# Altium PCB PCB smart socet protopype.PcbDoc
Units mm, origin at the board's own origin, x right, y up, seen from the top; angles counter-clockwise.
Board outline 60.25 x 55.25 mm, 2 copper layers (Top Layer, Bottom Layer), stack 1.569 mm thick; 26 components, 16 nets, 82 pads, 0 vias.
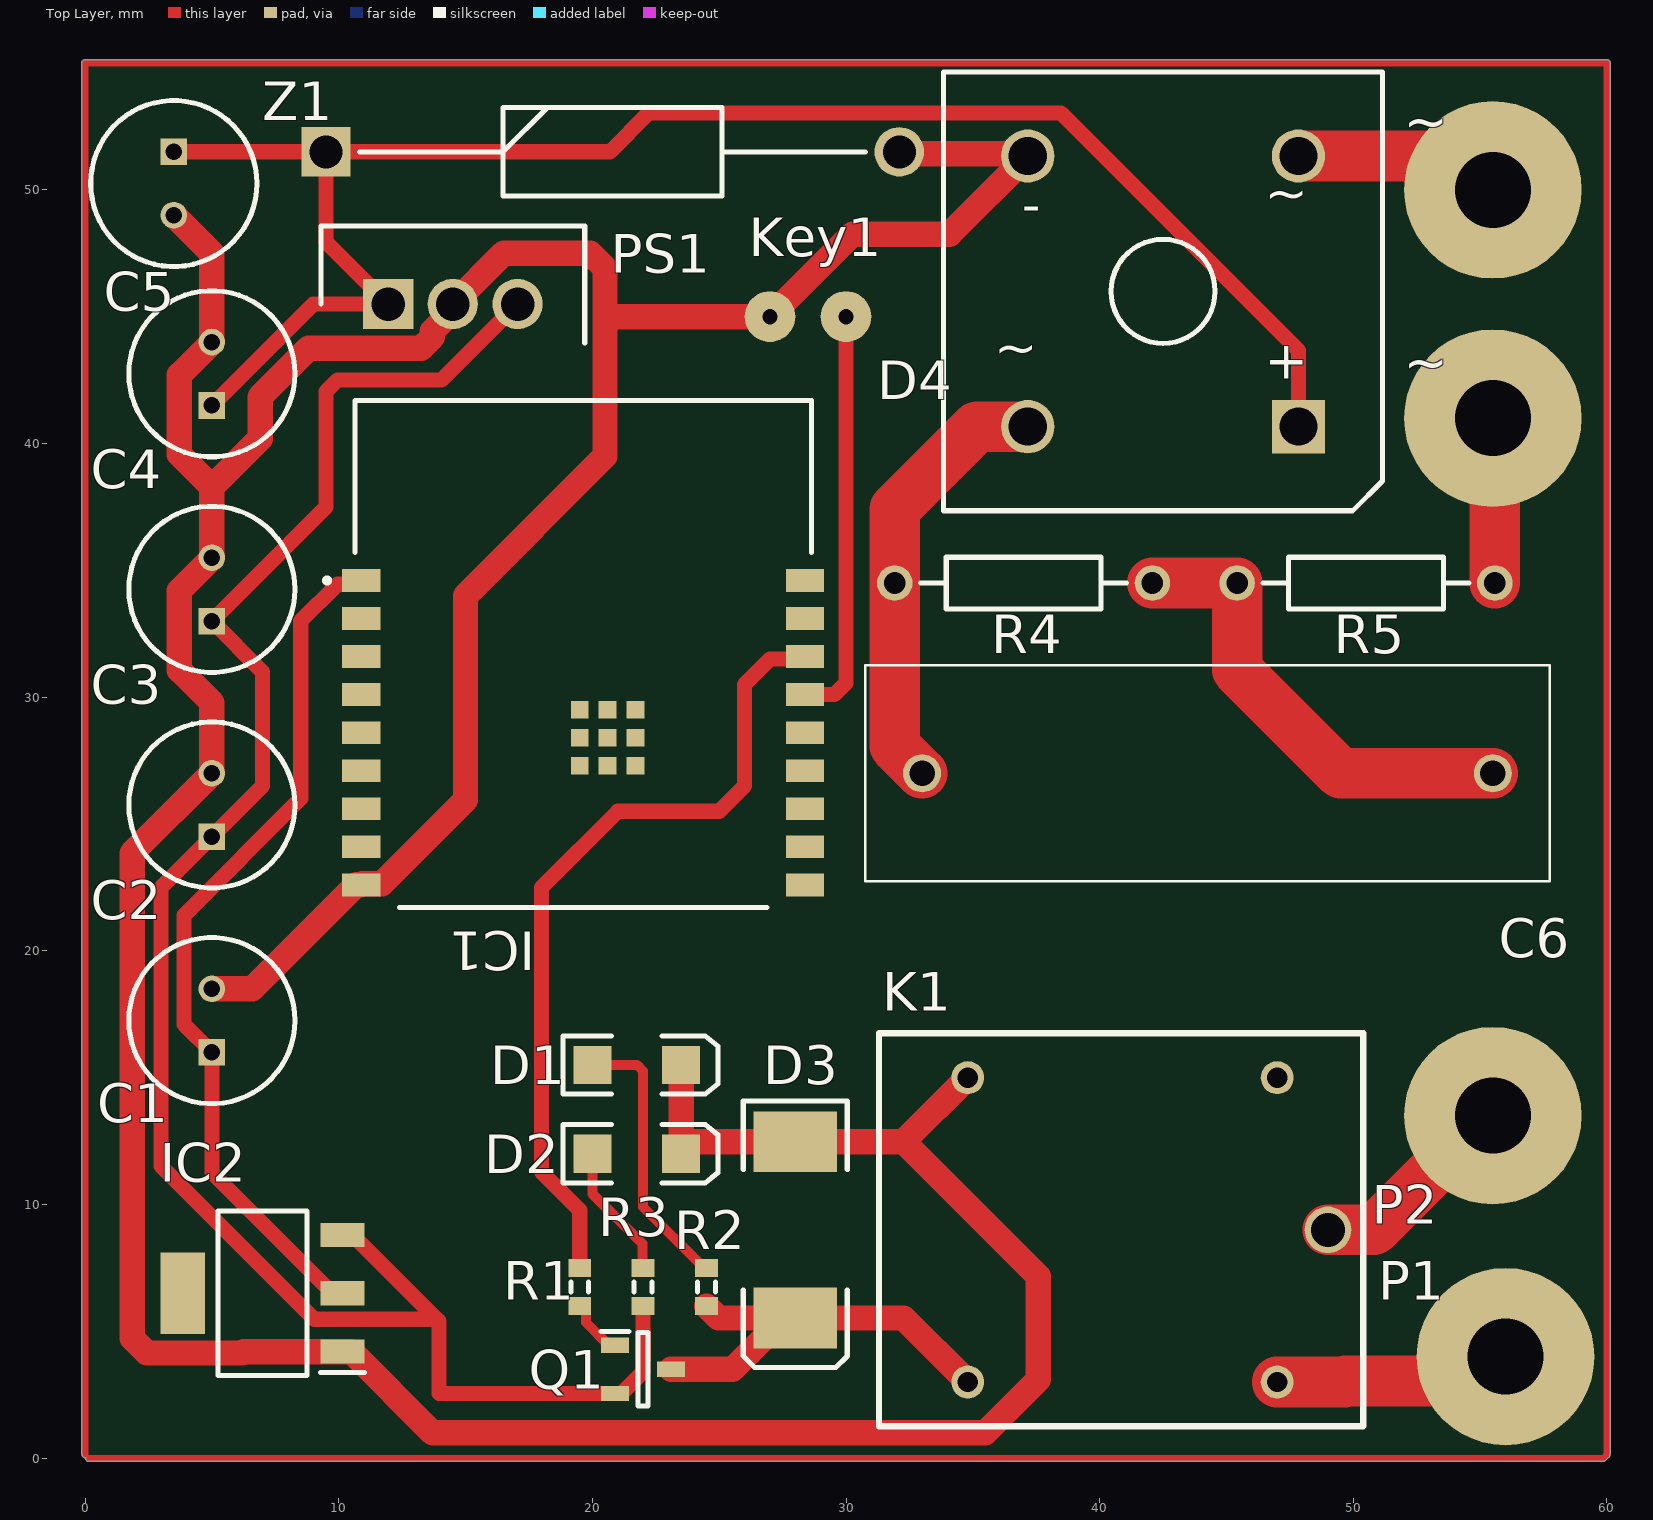
[diagram p0: Top Layer view]
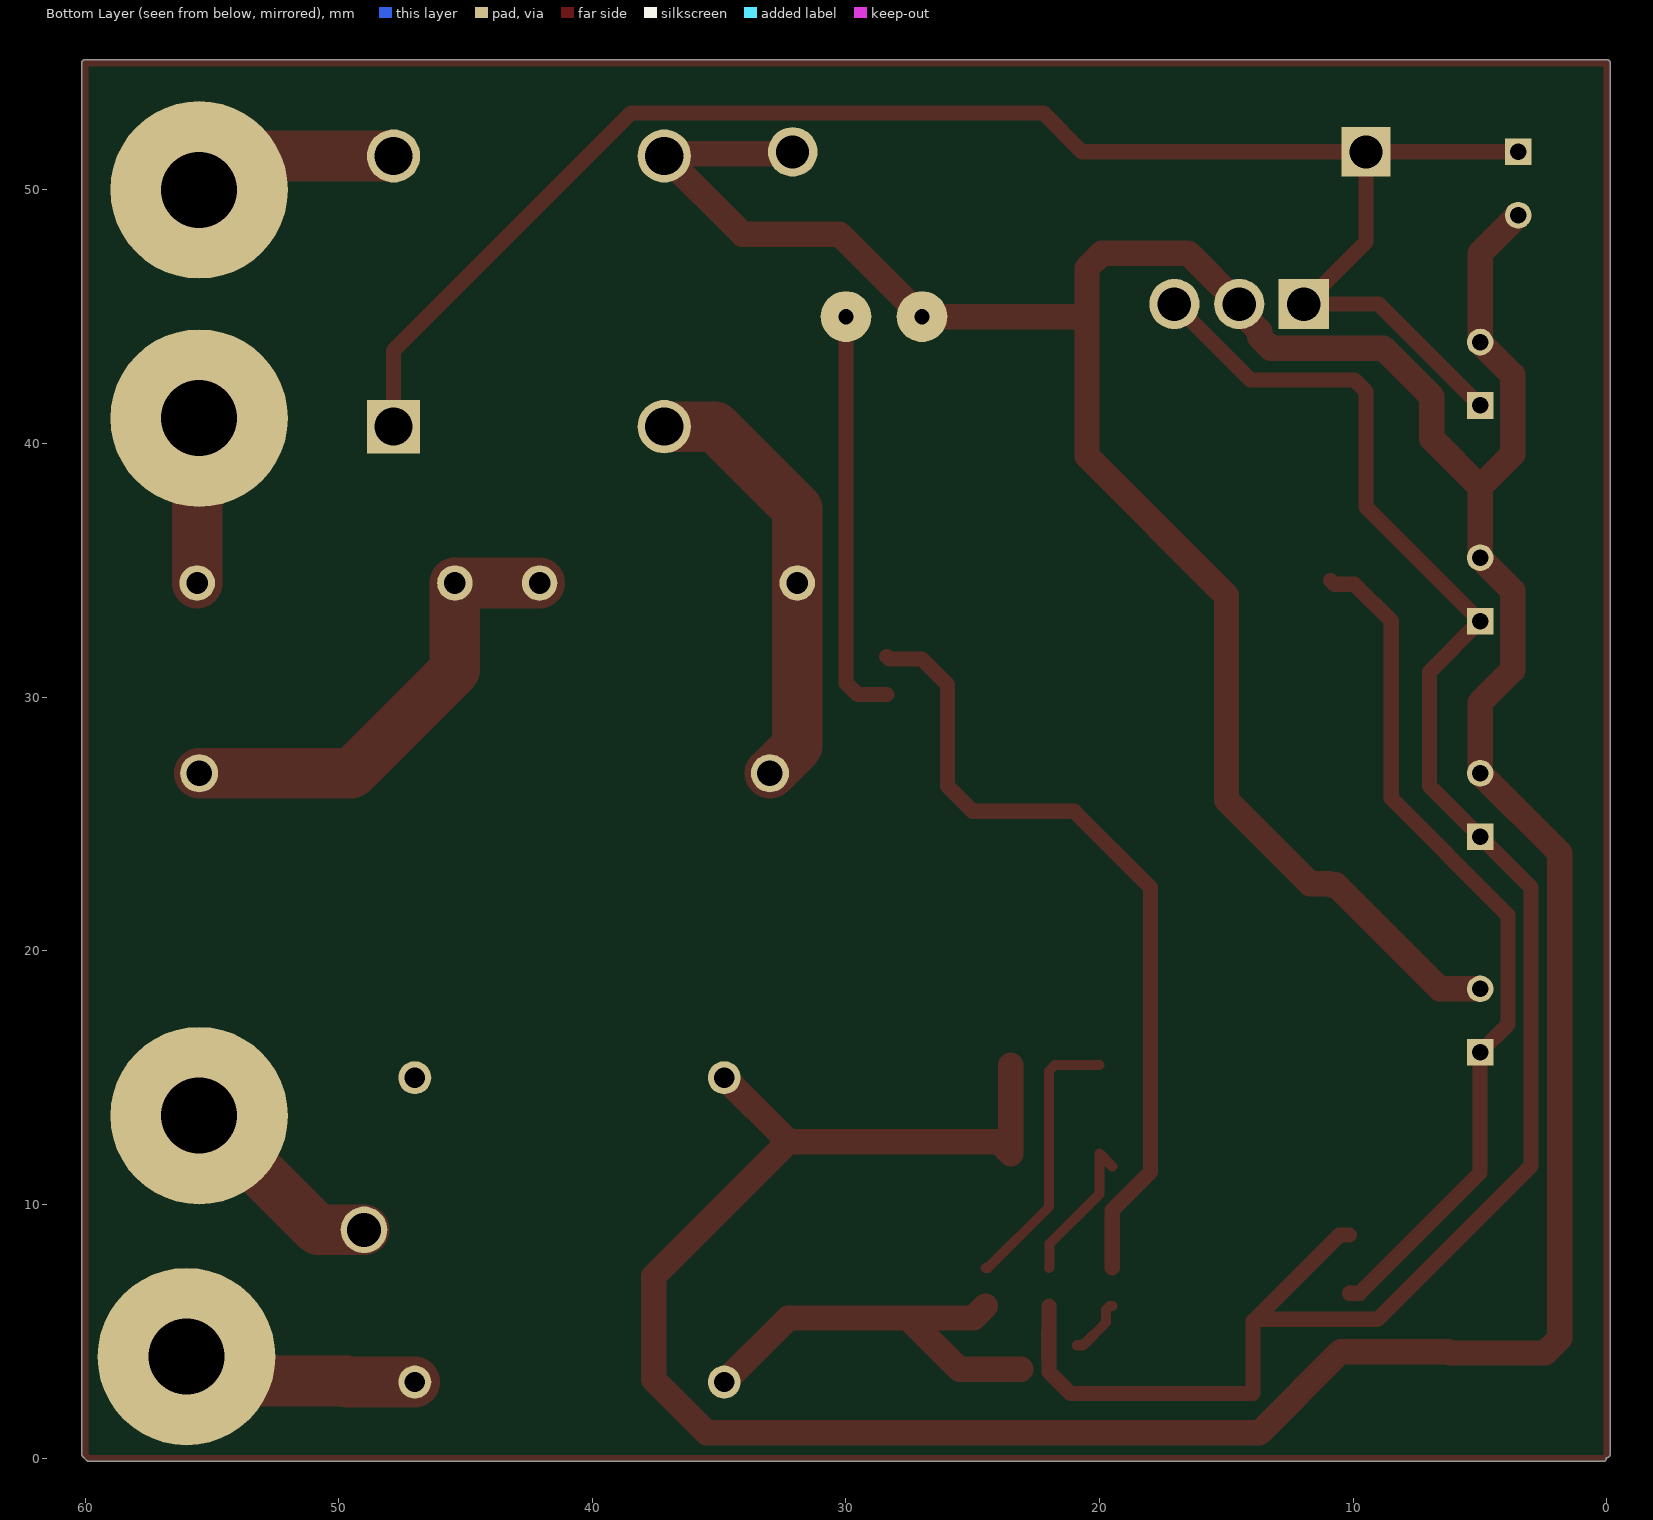
[diagram p1: Bottom Layer view, seen from below]
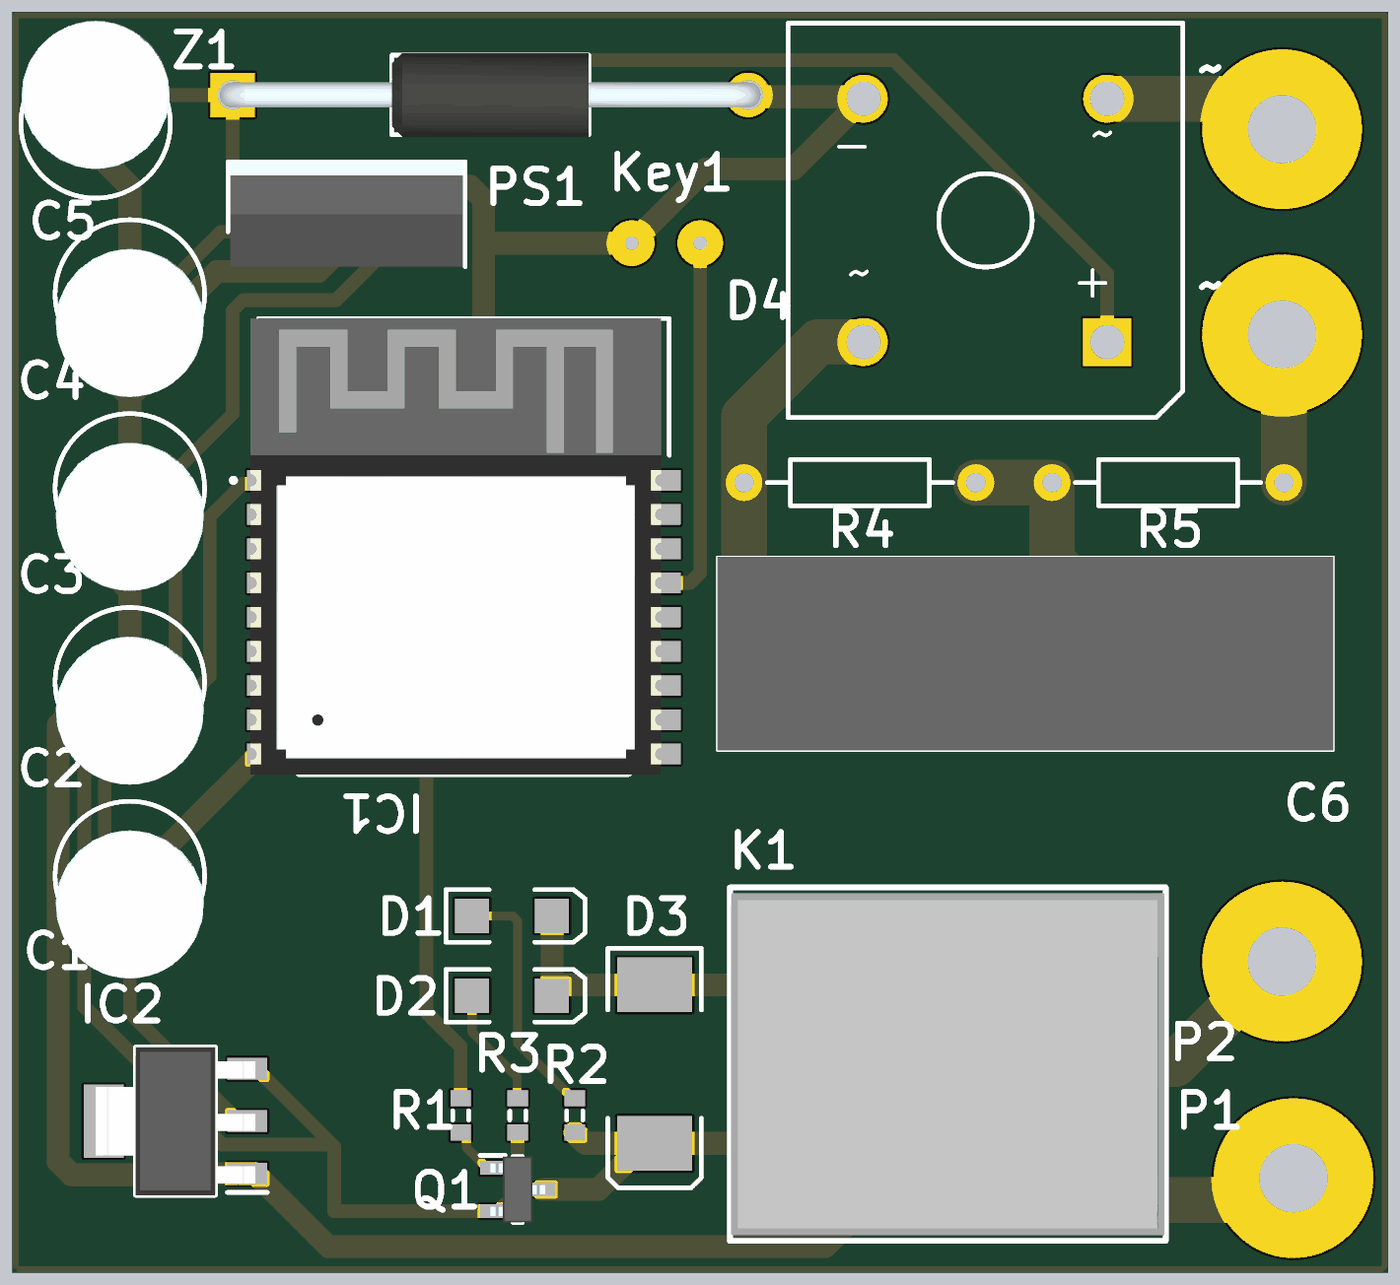
[diagram p2: 3D render of the assembled board from above, using the file's embedded part models]

## Layer stack, top to bottom
Top Solder: solder mask 0.0254, SM-001, Dk 4
Top Layer: signal copper 0.035
Dielectric 1: core 1.4986, Core-043, Dk 4.3
Bottom Layer: signal copper 0.035
Bottom Solder: solder mask 0.0254, SM-001, Dk 4

## Board outline
-0.127,0.149 ccw(c0,0.149) 0.024,0.024 ccw(c0.149,0) 0.149,-0.127 59.851,-0.127 ccw(c59.851,0) 59.942,-0.09 59.941,-0.09 60.09,0.059 60.09,0.058 ccw(c60,0.149) 60.127,0.149 60.127,55 ccw(c60,55) 60,55.127 0,55.127 ccw(c0,55) -0.127,55

## Design rules (kind name [scope] priority, off if disabled: settings)
Clearance [All] p1: gap=0.254 ignorepadtopadclearanceinfootprint=FALSE except(0: Arc-Hole Track-Hole SMDPad-Hole THPad-Hole Via-Hole Fill-Hole Poly-Hole Region-Hole Text-Hole; 0.3: Arc-Arc Arc-Track Track-Track)
PolygonConnect [All] p1: connectstyle=Relief reliefconductorwidth=0.254 reliefentries=4 polygonreliefangle="90 Angle" airgapwidth=0.254
RoutingVias [All] p1: holewidth=0 width=1 viastyle="Through Hole" minholewidth=0 minwidth=0 maxholewidth=1 maxwidth=2
SolderMaskExpansion [All] p1: expansion=0.102 istentingtop=FALSE
Width [All] p1: maxlimit=2 minlimit=0.4 preferedwidth=0.6 minimp=50.000000 maximp=50.000000 favimp=50.000000
30 further rules are at their usual default settings.

## Classes and differential pairs
component class Sheet1: C1 C2 C3 C4 C5 C6 D1 D2 D3 D4 IC1 IC2 K1 Key1 P1 P2 PS1 Q1 R1 R2 R3 R4 R5 Z1

## Components (designator, comment, footprint, x,y, rotation, side; value= is the part's Value field where it differs from the comment)
C1 "22мкФ" CAPPRD250W45D655H650 5,16 r90 top
C2 "10мкФ" CAPPRD250W45D655H650 5,24.5 r90 top
C3 "100мкФ, 16В" CAPPRD250W45D655H650 5,33 r90 top
C4 "2200мкФ, 16В" CAPPRD250W45D655H650 5,41.5 r90 top
C5 "330мкФ, 16В" CAPPRD250W45D655H650 3.5,51.5 r270 top
C6 "5мкФ, 16В" MKP1G033305F00JSSD 33,27 r0 top
D1 "LED2" 3.2X1.6X1.1 21.75,15.5 r0 top
D2 "LED2" 3.2X1.6X1.1 21.75,12 r0 top
D3 "Diode" SMC 28,9 r270 top
D4 "2W10G-E4/51" D-46_6A 42.5,46 r180 top
IC1 "ESP32-C3-WROOM-02-N4" ESP32C3WROOM02N4 20.6,28.4 r0 top
IC2 "LM1117IMP-3.3_NOPB" SOT230P700X180-4N 7,6.5 r180 top
K1 "SRD-05VDC-SL-C" SRD 49,9 r180 top
Key1 "Button" "Button remote" 28.5,45 r180 top
P1 "Power_pin" "Power_hole 7-3"#1 56,4 r0 top
P2 "Power_pin" "Power_hole 7-3"#1 55.5,13.5 r0 top
PS1 "L78M05ABV-DG" TO255P460X1020X2008-3P 11.95,45.5 r0 top
Q1 "S8550" SOT95P240X115-3N 22,3.5 r0 top
R1 "Res3" J1-0603 19.5,6.75 r270 top value=1K
R2 "Res3" J1-0603 24.5,6.75 r270 top value=1K
R3 "Res3" J1-0603 22,6.75 r270 top value=1K
R4 "Res2" AXIAL-0.4 37,34.5 r0 top value=0.5М
R5 "Res2" AXIAL-0.4 50.5,34.5 r0 top value=10
Z1 "1N5349BRLG" DIOAD2260W109L864D349 9.5,51.5 r0 top
~ "Comment" "Power_hole 7-3"#2 55.5,50 r0 top
~ "Comment" "Power_hole 7-3"#2 55.5,41 r0 top

## Footprints (in the part's own frame and the unit in brackets; to place one, negate y for a bottom-side part, rotate by r counter-clockwise, add the part's x,y. Pads: shape width x height; smd on the part's side, far side on the other; paste and mask are expansions set on the pad)
3.2X1.6X1.1 [mm] "SMT LED; 2 Flat Leads"
  rect 1.5x1.5 smd: 1(-1.75,0) 2(1.75,0)
  silkscreen extent -2.9,-1.15 3.2,1.15
AXIAL-0.4 [mm] "Axial Device, Thru-Hole; 2 Leads; 0.4 in Pin Spacing"
  round 1.4 hole 0.85: 1(-5.08,0) 2(5.08,0)
  silkscreen extent -4.06,-1.02 4.06,1.02
"Button remote" [mm]
  round 2 hole 0.6: 1(-1.5,0) 2(1.5,0)
CAPPRD250W45D655H650 [mm]
  rect 1.05x1.05 hole 0.65: 1(0,0)
  round 1.05 hole 0.65: 2(2.5,0)
  silkscreen extent -2.02,-3.27 4.52,3.27, body extent -3.25,-3.25 3.25,3.25, height 5.7
D-46_6A [mm] "Bridge Rectifier; 4 Terminals; Body 16.8 x 16.8 mm (typ); Pitch 10.67 mm"
  rect 2.1x2.1 hole 1.5: 1(-5.335,5.335)
  round 2.1 hole 1.5: 2(-5.335,-5.335) 3(5.335,-5.335) 4(5.335,5.335)
  silkscreen extent -8.65,-8.65 8.65,8.65, body extent -8.65,-8.65 8.65,8.65, height 6.35
DIOAD2260W109L864D349 [mm]
  rect 1.95x1.95 hole 1.3: 1(0,0)
  round 1.95 hole 1.3: 2(22.6,0)
  silkscreen extent 1.33,-1.75 21.27,1.75, body extent -0.54,-1.84 23.14,1.84, height 3.68
ESP32C3WROOM02N4 [mm]
  rect 1.5x0.9 smd: 1(-9.71,6.2) 2(-9.71,4.7) 3(-9.71,3.2) 4(-9.71,1.7) 5(-9.71,0.2) 6(-9.71,-1.3) 7(-9.71,-2.8) 8(-9.71,-4.3) 9(-9.71,-5.8) 10(7.79,-5.8) 11(7.79,-4.3) 12(7.79,-2.8) 13(7.79,-1.3) 14(7.79,0.2) 15(7.79,1.7) 16(7.79,3.2) 17(7.79,4.7) 18(7.79,6.2)
  rect 0.7x0.7 smd: 19(0,0) 20(1.1,0) 21(1.1,1.1) 22(0,1.1) 23(-1.1,1.1) 24(-1.1,0) 25(-1.1,-1.1) 26(0,-1.1) 27(1.1,-1.1)
  silkscreen extent -11.16,-6.7 8.04,13.3, body extent -10.31,-6.7 7.69,13.3, height 3.2
J1-0603 [mm] "Chip Resistor, Body 1.6x0.8mm, IPC High Density"
  rect 0.7x0.9 smd: 1(-0.75,0) 2(0.75,0)
  silkscreen extent -0.2,-0.35 0.2,0.35, body extent -0.85,-0.48 0.85,0.48, height 0.9
MKP1G033305F00JSSD [mm]
  round 1.5 hole 1: 1(0,0) 2(22.5,0)
  silkscreen extent -2.25,-4.25 24.75,4.25, body extent -2.25,-4.25 24.75,4.25, height 18.6
"Power_hole 7-3"#1 [mm]
  round 7 hole 3: 1(0,0)
"Power_hole 7-3"#2 [mm]
  round 7 hole 3: ~(0,0)
SMC [mm] "DO-214-AB/SMC; 2 C-Bend Leads; Body 7.9 x 5.9 mm, inc. leads (LxW)"
  rect 2.4x3.3 smd: 1(-3.475,0) 2(3.475,0)
  silkscreen extent -5.07,-2.05 5.43,2.05
SOT95P240X115-3N [mm]
  rect 1.1x0.6 smd: 1(-1.1,0.95) 2(-1.1,-0.95) 3(1.1,0)
  silkscreen extent -1.65,-1.45 0.2,1.5, body extent -1.2,-1.45 1.2,1.45, height 1.15
SOT230P700X180-4N [mm]
  rect 1.75x0.95 smd: 1(-3.15,2.3) 2(-3.15,0) 3(-3.15,-2.3)
  rect 1.75x3.2 smd: 4(3.15,0)
  silkscreen extent -4.03,-3.25 1.75,3.25, body extent -3.5,-3.25 3.5,3.25, height 1.68
SRD [mm]
  round 1.84 hole 1.34: 1(0,0)
  round 1.3 hole 0.8: 2(2,6) 3(2,-6) 4(14.2,6) 5(14.2,-6)
  silkscreen extent -1.4,-7.75 17.7,7.75, body extent -1.35,-7.5 17.65,7.5, height 15.04
TO255P460X1020X2008-3P [mm]
  rect 1.98x1.98 hole 1.32: 1(0,0)
  round 1.98 hole 1.32: 2(2.55,0) 3(5.1,0)
  silkscreen extent -2.65,-1.53 7.75,3.07, body extent -2.55,-1.53 7.65,3.07, height 19.21

## Part data
C1 C2 C3 C4 C5: library part 16MH5100MEFC6.3X5, "Capacitor Polarised", Manufacturer_Name=Rubycon, Mouser Part Number=232-16MH5100MEFC63X5, Datasheet Link=http://www.rubycon.co.jp/en/catalog/e_pdfs/aluminum/e_mh5.pdf, Height=6.5mm, Manufacturer_Part_Number=16MH5100MEFC6.3X5, Mouser Price/Stock=https://www.mouser.co.uk/ProductDetail/Rubycon/16MH5100MEFC63X5?qs=T3oQrply3y%252Bof2aeEfE49A%3D%3D
C6: library part MKP1G033305F00JSSD, "Capacitor", Manufacturer_Name=WIMA, Mouser Part Number=505-MKP1G033305F00JS, Datasheet Link=https://componentsearchengine.com/Datasheets/1/MKP1G033305F00JSSD.pdf, Height=18.5mm, Manufacturer_Part_Number=MKP1G033305F00JSSD, Mouser Price/Stock=https://www.mouser.co.uk/ProductDetail/WIMA/MKP1G033305F00JSSD?qs=OanN%252B0kfw%2FYGuQnfZtfF2A%3D%3D
D1 D2: "Typical RED, GREEN, YELLOW, AMBER GaAs LED", LatestRevisionDate=17-Jul-2002, LatestRevisionNote="Re-released for DXP Platform.", PackageDescription="SM LED; 2 Flat Leads", PackageReference=3.2X1.6X1.1, PackageVersion=Feb-2002, Published=8-Jun-2000, Publisher="Altium Limited"
D3: "Default Diode", Code_JEDEC=DO-214-AB, LatestRevisionDate=17-Jul-2002, LatestRevisionNote="Re-released for DXP Platform.", PackageDescription="DO-214-AB/SMC; 2 C-Bend Leads; Body 7.9 x 5.9 mm, inc. leads (LxW)", PackageReference=SMC, PackageVersion=Sep-1996, Published=8-Jun-2000, Publisher="Altium Limited"
D4: library part Bridge2, "Diode Bridge", LatestRevisionDate=17-Jul-2002, LatestRevisionNote="Re-released for DXP Platform.", PackageDescription="Bridge Rectifier; 4 Terminals; Body 16.8 x 16.8 mm (typ); Pitch 10.67 mm", PackageReference=D-46_6A, Published=24-Mar-1999, Publisher="Altium Limited"
IC1: "Integrated Circuit", Manufacturer_Name="Espressif Systems", Mouser Part Number=356-ESP32C3WROOM02N4, Datasheet Link=https://www.mouser.ch/datasheet/2/891/Espressif_ESP32_C3_WROOM_02-2006871.pdf, Height=3.35mm, Manufacturer_Part_Number=ESP32-C3-WROOM-02-N4, Mouser Price/Stock=https://www.mouser.co.uk/ProductDetail/Espressif-Systems/ESP32-C3-WROOM-02-N4?qs=stqOd1AaK7%2FqjTZKEOgfUg%3D%3D
IC2: "Integrated Circuit", Arrow Part Number=LM1117IMP-3.3/NOPB, Manufacturer_Name="Texas Instruments", Mouser Part Number=926-LM1117IMP3.3NOPB, Arrow Price/Stock=https://www.arrow.com/en/products/lm1117imp-3.3nopb/texas-instruments?region=nac, Datasheet Link=https://www.ti.com/lit/ds/symlink/lm1117.pdf?ts=1607578196475&ref_url=https%253A%252F%252Fwww.google.com%252F, Height=1.8mm, Manufacturer_Part_Number=LM1117IMP-3.3/NOPB, Mouser Price/Stock=https://www.mouser.co.uk/ProductDetail/Texas-Instruments/LM1117IMP-33-NOPB?qs=X1J7HmVL2ZFbpN1TgOsjYQ%3D%3D
K1: "Relay or Contactor", Manufacturer_Name="Songle Relay", Datasheet Link=http://files.microjpm.webnode.com/200001010-dda41de9e1/Songle%20Relay%20Datasheet.pdf, Manufacturer_Part_Number=SRD-05VDC-SL-C
PS1: "Power Supply", Manufacturer_Name=STMicroelectronics, Mouser Part Number=511-L78M05ABV-DG, Arrow Part Number=L78M05ABV-DG, Arrow Price/Stock=https://www.arrow.com/en/products/l78m05abv-dg/stmicroelectronics?region=europe, Datasheet Link=https://componentsearchengine.com/Datasheets/1/L78M05ABV-DG.pdf, Height=4.6mm, Manufacturer_Part_Number=L78M05ABV-DG, Mouser Price/Stock=https://www.mouser.co.uk/ProductDetail/STMicroelectronics/L78M05ABV-DG?qs=WHlX%252B%252B9%2FRwDCteR6J2ExhA%3D%3D
Q1: "Transistor BJT PNP", Manufacturer_Name="Changjiang Electronics Tech (CJ)", Datasheet Link=https://datasheet.lcsc.com/szlcsc/Changjiang-Electronics-Tech-CJ-S8550_C105432.pdf, Height=1.15mm, Manufacturer_Part_Number=S8550
R1 R2 R3 R4 R5: "Resistor", Published=8-Jun-2000, Publisher="Altium Limited"
  R1 R2 R3: LatestRevisionDate=29-May-2009, LatestRevisionNote="IPC-7351 Footprint Added.", PackageDescription="Chip Resistor", PackageReference=J1-0603
  R4 R5: LatestRevisionDate=17-Jul-2002, LatestRevisionNote="Re-released for DXP Platform.", PackageDescription="Axial Device, Thru-Hole; 2 Leads; 0.4 in Pin Spacing", PackageReference=AXIAL-0.4
Z1: "Zener Diode", Manufacturer_Name="ON Semiconductor", Mouser Part Number=863-1N5349BRLG, Arrow Part Number=1N5349BRLG, Arrow Price/Stock=https://www.arrow.com/en/products/1n5349brlg/on-semiconductor?region=nac, Datasheet Link=https://datasheet.datasheetarchive.com/originals/distributors/SFDatasheet-3/sf-00075052.pdf, Manufacturer_Part_Number=1N5349BRLG, Mouser Price/Stock=https://www.mouser.co.uk/ProductDetail/onsemi/1N5349BRLG?qs=y2kkmE52mdPPPvJa3zV6XA%3D%3D

## Nets (pads, with @x,y where several pads share a name; then routed paths per layer and width w, separated by ;. In a path a pad name is that pad's centre, name@x,y a point inside that pad or via, vN(x,y) a via of type N, cw(c..) or ccw(c..) an arc to the next point about the centre after c; other vN are vias at no path point)
+3.3: C1.1 IC1.1 IC2.2 | length 34.3
  Top Layer w0.6: IC2.2 9.75,6.5 5,11.25 C1.1 3.9,17.1 3.9,21.4 8.5,26 8.5,33 9.95,34.45 10.74,34.45 IC1.1
+5: C2.1 C3.1 IC2.3 PS1.3 Q1.2 R3.2 | length 76.3
  Top Layer w0.6: IC2.3 10.55,8.8 13.879,5.471 ; PS1.3 14.05,42.5 9.951,42.5 9.5,42.049 9.5,37.5 C3.1 7,31 7,26.5 C2.1 3,22.5 3,11.517 9.046,5.471 13.879,5.471 ; R3.2 21.996,5.996 21.996,5.687 21.996,4.987 22.004,4.979 22.004,3.921 21.996,3.913 21.996,3.396 21.15,2.55 Q1.2 13.95,2.55 13.95,5.4 13.879,5.471
+220V: D4.2 ~.~@55.5,50 | length 8.2
  Top Layer w2: D4.2 52.812,51.335 54.147,50 ~.~@55.5,50
-220V: R5.2 ~.~@55.5,41 | length 8.5
  Top Layer w2: ~.~@55.5,41 55.58,40.92 ~.~@55.58,40.08 ; R5.2 ~.~@55.58,40.08 ; ~.~@57,41.5 ~.~@55.58,40.08
COM: K1.1 P2.1 | length 9.7
  Top Layer w2: K1.1 50.808,9 55.308,13.5 P2.1 P2.1@54.543,14.457
GND: C1.2 C2.2 C3.2 C4.2 C5.2 D1.2 D2.2 D3.1 D4.3 IC1.9 IC2.1 K1.5 Key1.2 PS1.2 Z1.2 | length 195.7
  Top Layer w1: C5.2 5,47.5 C4.2 5,43.986 3.721,42.707 3.721,39.565 5,38.286 ; C1.2 5.01,18.51 6.6,18.51 10.69,22.6 IC1.9 10.94,22.65 11.706,22.65 15,25.944 15,34 20.5,39.5 20.5,45 ; D1.2 D2.2 23.975,12.475 D3.1 32.275,12.475 ; Z1.2 32.183,51.417 37.082,51.417 D4.3 34.085,48.255 30.255,48.255 Key1.2 20.5,45 ; K1.5 32.275,12.475 ; 5,38.286 6.906,40.192 6.906,41.85 8.812,43.756 13.252,43.756 13.694,44.198 13.694,44.429 14.5,45.235 PS1.2 16.5,47.5 19.914,47.5 20.5,46.914 20.5,45 ; 5,38.286 C3.2 5,35.486 3.721,34.207 3.721,31.065 5,29.786 C2.2 1.854,23.854 1.854,4.732 2.44,4.146 6.192,4.146 6.246,4.2 IC2.1 10.5,4.2 13.704,0.996 14,0.996 35.483,0.996 37.586,3.099 37.586,7.164 32.275,12.475
Ln1: IC1.16 R1.1 | length 32.1
  Top Layer w0.6: R1.1 19.5,9.775 18,11.275 18,22.5 21,25.5 25,25.5 26,26.5 26,30.5 27,31.5 28.29,31.5 IC1.16
NetC4_1: C4.1 C5.1 D4.1 PS1.1 Z1.1 | length 67.5
  Top Layer w0.6: C5.1 Z1.1 ; C4.1 9,45.5 PS1.1 9.5,47.95 Z1.1 ; D4.1 47.835,43.665 38.471,53.029 22.219,53.029 20.69,51.5 Z1.1
NetC6_1: C6.1 D4.4 R4.1 | length 17.5
  Top Layer w2: C6.1 31.92,28.08 R4.1 31.92,37.42 35.165,40.665 D4.4
NetC6_2: C6.2 R4.2 R5.1 | length 18.5
  Top Layer w2: R4.2 R5.1 45.42,31.08 49.5,27 C6.2
NetD1_1: D1.1 R2.1 | length 11
  Top Layer w0.4: D1.1 21.766,15.5 22,15.266 22,9.9 24.4,7.5 R2.1
NetD2_1: D2.1 R3.1 | length 6
  Top Layer w0.4: D2.1@19.5,11.5 D2.1 20,10.425 21.975,8.45 21.975,7.525 R3.1
NetD3_2: D3.2 K1.4 Q1.3 R2.2 | length 16.8
  Top Layer w0.4: D3.2@27.775,5.525 D3.2
  Top Layer w1: Q1.3 25.525,3.5 D3.2@27.55,5.525 ; R2.2 24.975,5.525 D3.2@27.55,5.525 ; D3.2@27.775,5.525 D3.2@27.55,5.525 ; D3.2 32.275,5.525 K1.4
NetIC1_15: IC1.15 Key1.1 | length 16.2
  Top Layer w0.6: IC1.15 29.549,30.1 30,30.551 Key1.1
NetQ1_1: Q1.1 R1.2 | length 2.3
  Top Layer w0.4: R1.2 19.6,6 19.75,5.85 19.75,5.35 20.65,4.45 Q1.1
NO: K1.2 P1.1 | length 9.4
  Top Layer w2: K1.2 49.647,3 49.69,3.043 55.043,3.043 P1.1
pads on no net: IC1.2 IC1.3 IC1.4 IC1.5 IC1.6 IC1.7 IC1.8 IC1.10 IC1.11 IC1.12 IC1.13 IC1.14 IC1.17 IC1.18 IC1.19 IC1.20 IC1.21 IC1.22 IC1.23 IC1.24 IC1.25 IC1.26 IC1.27 IC2.4 K1.3
copper on no net: | length 229.6
  Top Layer w0.254: 0,0.149 0,35 0,55 60,55 60,0.149 59.851,0 0.149,0

## Text inside footprints (layer, text, board x,y; h text height)
D4: Top Overlay "~" at 48.223,50.437 h1.5 r180; Top Overlay "~" at 37.555,44.341 h1.5 r180; Top Overlay "-" at 37.675,49.809 h1.5 r180; Top Overlay "+" at 48.223,43.833 h1.5 r180